# EAGLE board apple_all_pt1 (EAGLE 9.6.1)
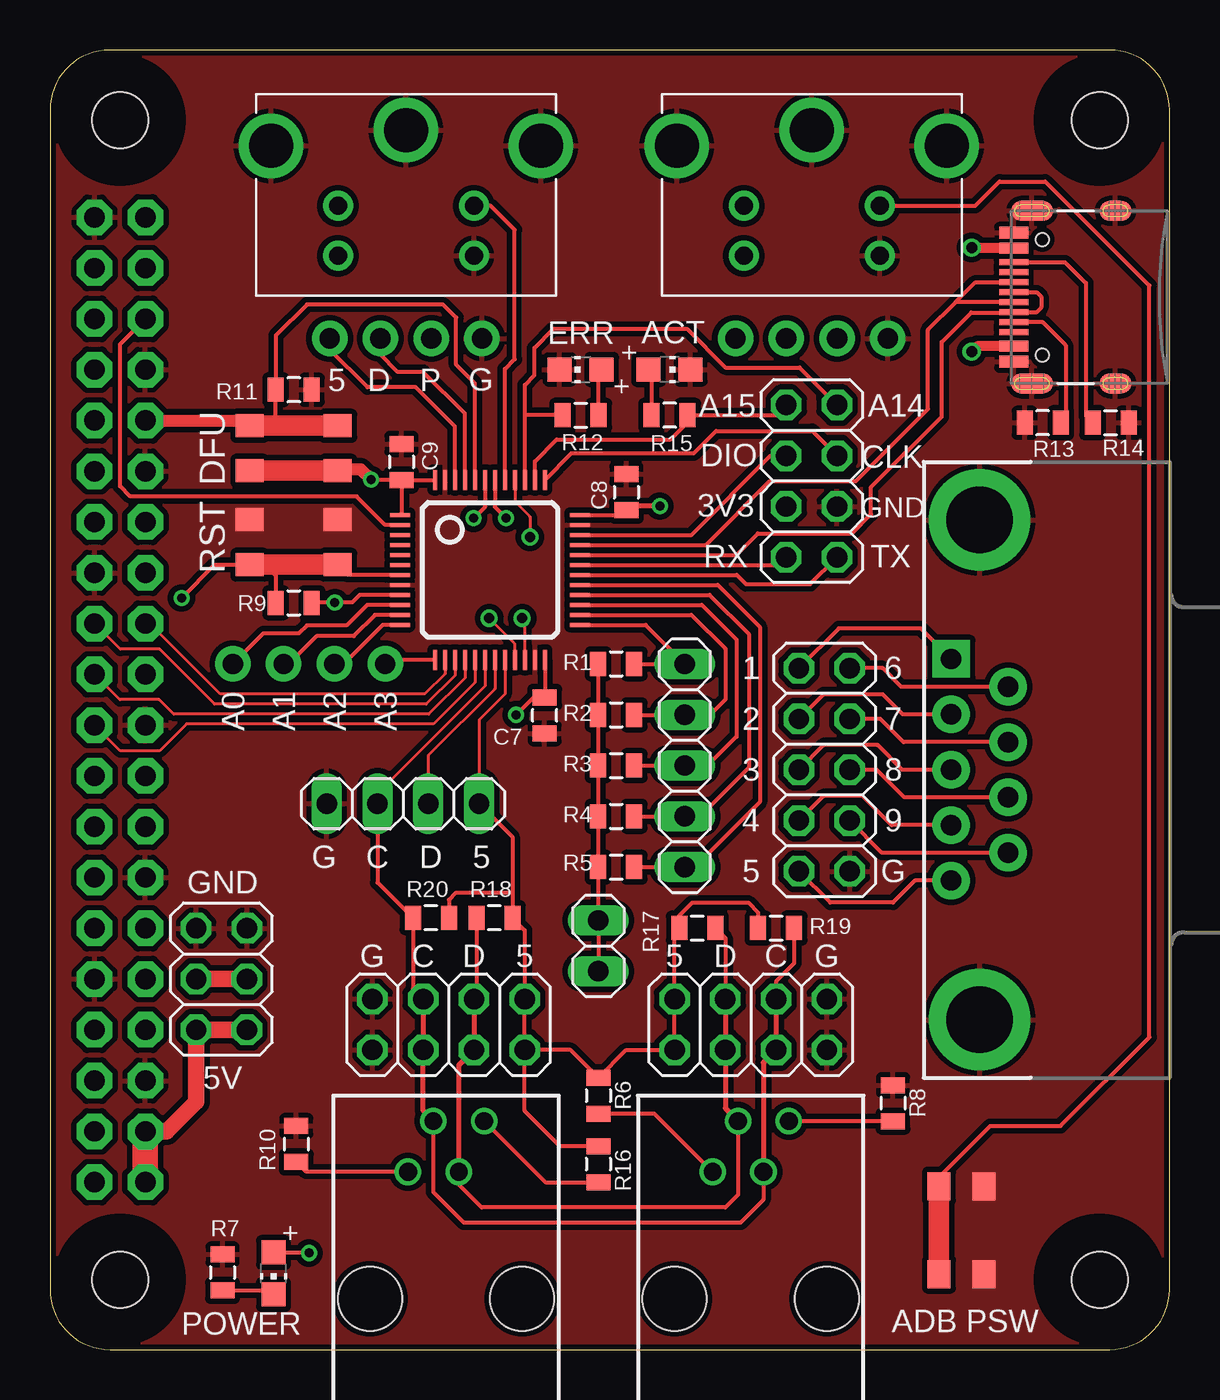
[diagram p0: board, top side]
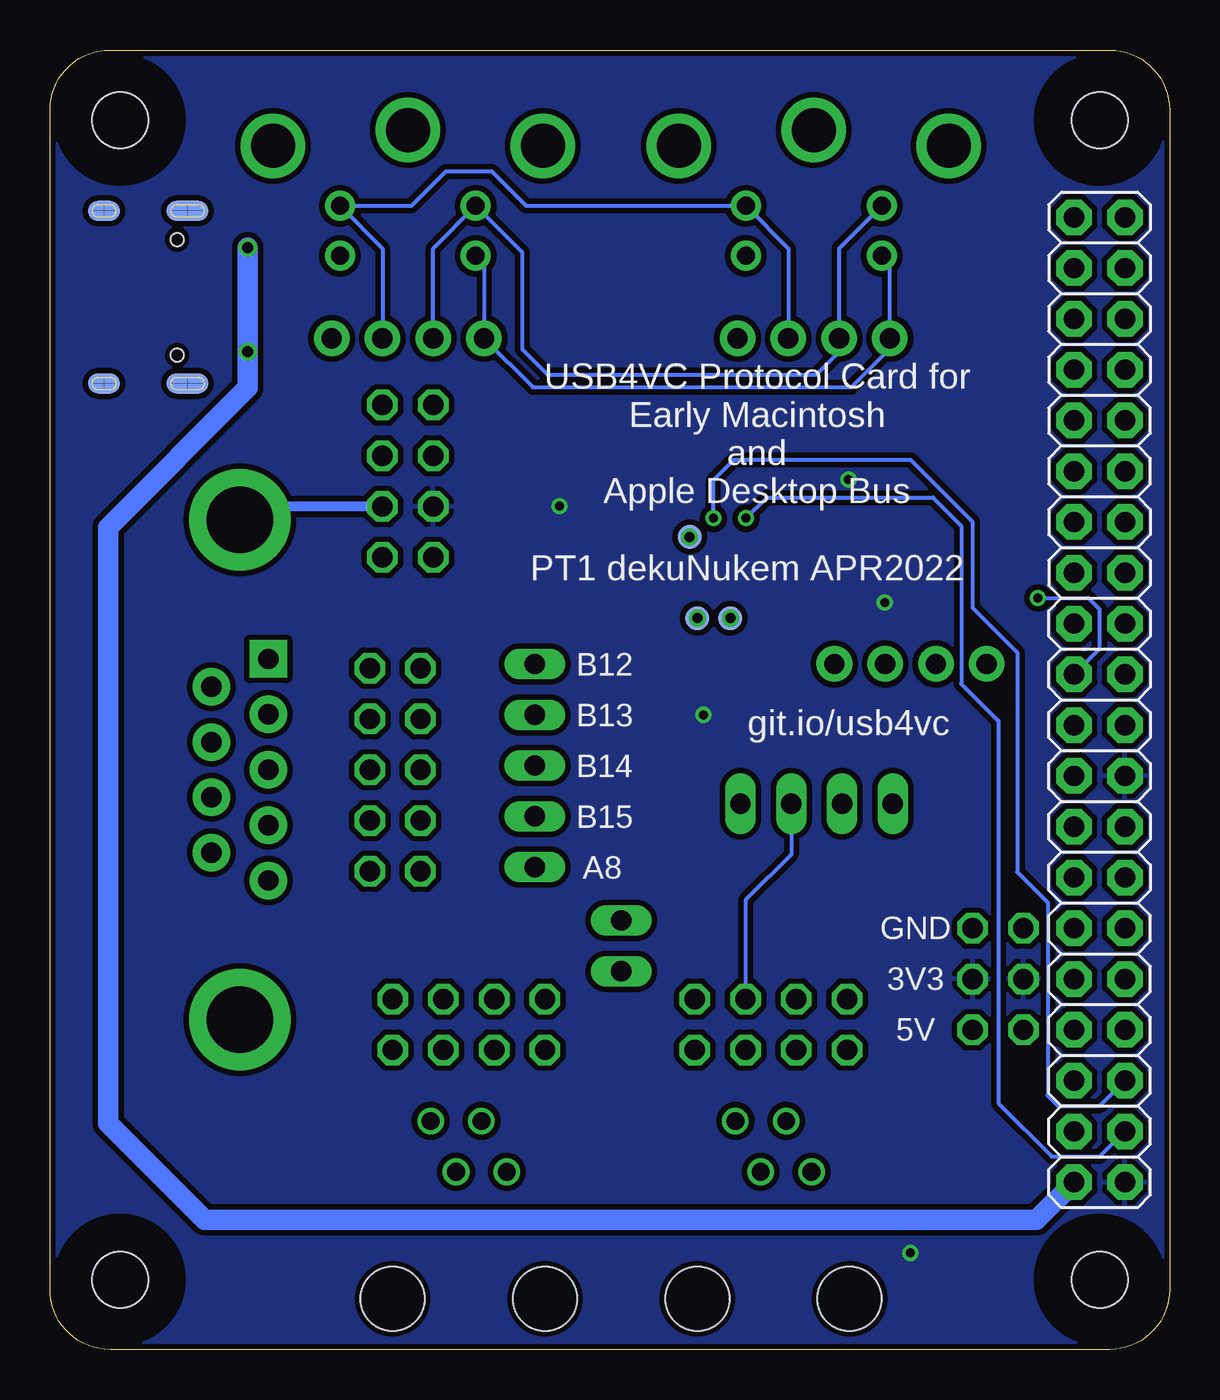
[diagram p1: board, bottom side, seen from below]

Size 56 x 65 mm. Coordinates in mm from the lower left corner, seen from the top.
Outline: 3,0 53,0 arc90 56,3 56,62 arc90 53,65 3,65 arc90 0,62 0,3 arc90 3,0
Copper layers (1*16): Top 0.035mm / dielectric 1.5mm / Bottom 0.035mm
Design rules "deku_2layer_6mil": minimum track width 6mil, minimum drill 15mil, track to track 6mil, track to pad 6mil, pad to pad 6mil, via to via 6mil, smd to smd 6mil, copper to edge 10mil, drill to drill 6mil, minimum pad ring 7mil, minimum via ring 7mil, stop-mask expansion 4mil, vias tented up to drill 25mil, thermal gap 10mil
Net classes: 1 power: width 0.178 mm

## Footprints (pad centres in the part's own frame; a part is rotated, then mirrored left to right if it is on the bottom)
0805@1 = smd 0.8 x 1.2: 1 -0.9,0; 2 0.9,0
TQFP48 = smd 0.2 x 1: 1 -2.75,-4.5; 2 -2.25,-4.5; 3 -1.75,-4.5; 4 -1.25,-4.5; 5 -0.75,-4.5; 6 -0.25,-4.5; 7 0.25,-4.5; 8 0.75,-4.5; 9 1.25,-4.5; 10 1.75,-4.5; 11 2.25,-4.5; 12 2.75,-4.5; 25 2.75,4.5; 26 2.25,4.5; 27 1.75,4.5; 28 1.25,4.5; 29 0.75,4.5; 30 0.25,4.5; 31 -0.25,4.5; 32 -0.75,4.5; 33 -1.25,4.5; 34 -1.75,4.5; 35 -2.25,4.5; 36 -2.75,4.5 | smd 1 x 0.2: 13 4.5,-2.75; 14 4.5,-2.25; 15 4.5,-1.75; 16 4.5,-1.25; 17 4.5,-0.75; 18 4.5,-0.25; 19 4.5,0.25; 20 4.5,0.75; 21 4.5,1.25; 22 4.5,1.75; 23 4.5,2.25; 24 4.5,2.75; 37 -4.5,2.75; 38 -4.5,2.25; 39 -4.5,1.75; 40 -4.5,1.25; 41 -4.5,0.75; 42 -4.5,0.25; 43 -4.5,-0.25; 44 -4.5,-0.75; 45 -4.5,-1.25; 46 -4.5,-1.75; 47 -4.5,-2.25; 48 -4.5,-2.75
DB9 = drill 1.016 pad 1.88 square: 1 -5.54,-1.42 | drill 1.016 pad 1.88: 2 -2.77,-1.42; 3 0,-1.42; 4 2.77,-1.42; 5 5.54,-1.42; 6 -4.15,1.42; 7 -1.38,1.42; 8 1.38,1.42; 9 4.15,1.42 | drill 3.302 pad 5.08: G1 -12.5,0; G2 12.5,0
USB-C-16P = smd 0.3 x 1.45: A5 -1.25,0; A6 -0.25,0; A7 0.25,0; A8 1.25,0; B5 1.75,0; B6 0.75,0; B7 -0.75,0; B8 -1.75,0 | smd 0.6 x 1.45: GND -3.225,0; GND2 3.225,0 | smd 1 x 2.1: SHLD1 -4.32,-0.915; SHLD2 4.32,-0.915 | smd 1 x 2.1 bottom: SHLD3 -4.32,-0.915; SHLD4 4.32,-0.915 | smd 1 x 1.6: SHLD5 -4.32,-5.095; SHLD8 4.32,-5.095 | smd 1 x 1.6 bottom: SHLD6 -4.32,-5.095; SHLD7 4.32,-5.095 | smd 0.55 x 1.45: VBUS1 -2.45,0; VBUS2 2.45,0 | hole 0.65: -2.89,-1.445; 2.89,-1.445
2X20-BIG = drill 1.016 pad 1.778 octagon: 1 -24.13,-1.27; 2 -24.13,1.27; 3 -21.59,-1.27; 4 -21.59,1.27; 5 -19.05,-1.27; 6 -19.05,1.27; 7 -16.51,-1.27; 8 -16.51,1.27; 9 -13.97,-1.27; 10 -13.97,1.27; 11 -11.43,-1.27; 12 -11.43,1.27; 13 -8.89,-1.27; 14 -8.89,1.27; 15 -6.35,-1.27; 16 -6.35,1.27; 17 -3.81,-1.27; 18 -3.81,1.27; 19 -1.27,-1.27; 20 -1.27,1.27; 21 1.27,-1.27; 22 1.27,1.27; 23 3.81,-1.27; 24 3.81,1.27; 25 6.35,-1.27; 26 6.35,1.27; 27 8.89,-1.27; 28 8.89,1.27; 29 11.43,-1.27; 30 11.43,1.27; 31 13.97,-1.27; 32 13.97,1.27; 33 16.51,-1.27; 34 16.51,1.27; 35 19.05,-1.27; 36 19.05,1.27; 37 21.59,-1.27; 38 21.59,1.27; 39 24.13,-1.27; 40 24.13,1.27
2X03 = drill 1.016 octagon: 1 -2.54,-1.27; 2 -2.54,1.27; 3 0,-1.27; 4 0,1.27; 5 2.54,-1.27; 6 2.54,1.27
2X04 = drill 1.016 octagon: 1 -3.81,-1.27; 2 -3.81,1.27; 3 -1.27,-1.27; 4 -1.27,1.27; 5 1.27,-1.27; 6 1.27,1.27; 7 3.81,-1.27; 8 3.81,1.27
2X05 = drill 1.016 octagon: 1 -5.08,-1.27; 2 -5.08,1.27; 3 -2.54,-1.27; 4 -2.54,1.27; 5 0,-1.27; 6 0,1.27; 7 2.54,-1.27; 8 2.54,1.27; 9 5.08,-1.27; 10 5.08,1.27
1X05 = drill 1.016 long: 1 -5.08,0; 2 -2.54,0; 3 0,0; 4 2.54,0; 5 5.08,0
1X02 = drill 1.016 long: 1 -1.27,0; 2 1.27,0
1X04 = drill 1.016 long: 1 -3.81,0; 2 -1.27,0; 3 1.27,0; 4 3.81,0
CHIP-LED0805 = smd 1.2 x 1.2: A 0,-1.05; C 0,1.05
0805 = smd 0.8 x 1.2: 1 -0.9,0; 2 0.9,0
342_SWICH_FOOT = smd 1.4 x 1.15: P$1 -2.2,-1.125; P$2 -2.2,1.125; P$3 2.2,1.125; P$4 2.2,-1.125
TP12R = smd 1.2 x 1.2: TP 0,0
1X04-CLEANBIG = drill 1.016 pad 1.778: 1 -3.81,0; 2 -1.27,0; 3 1.27,0; 4 3.81,0
M2.5HOLE = hole 2.8: 0,0
DIN4 = drill 0.9 pad 1.5: 5V -3.4,-6.3; ADB -3.4,-3.8; GND 3.4,-6.3; PSW 3.4,-3.8 | drill 2.2: SHIELD1 -6.75,-0.8; SHIELD2 0,0; SHIELD3 6.75,-0.8
RJ9 = drill 0.889: 1 -1.905,6.35; 2 -0.635,8.89; 3 0.635,6.35; 4 1.905,8.89 | hole 3.2: -3.81,0; 3.81,0

## Placement (x,y rotation side)
C7  100nF  [0805@1]  24.74,31.72 90 top
C8  100nF  [0805@1]  28.83,42.88 270 top
C9  100nF  [0805@1]  17.58,44.4 270 top
IC1  STM32F072C8T6  [TQFP48]  22,39 270 top
J2  [DB9]  46.5,29 270 top
J4  [USB-C-16P]  48.2,52.63 90 top
JP1  [2X20-BIG]  3.5,32.5 90 bottom
JP2  [2X03]  8.58,18.53 90 top
JP3  [2X04]  38.1,43.43 270 top
JP4  [2X04]  19.94,16.26 0 top
JP5  [2X04]  35.05,16.26 0 top
JP6  [2X05]  38.73,29 270 top
JP7  [1X05]  31.75,29.21 90 top
JP8  [1X02]  27.43,20.19 90 top
JP9  [1X04]  17.65,27.3 0 top
LED1  [CHIP-LED0805]  11.18,3.81 180 top
LED2  [CHIP-LED0805]  26.54,49.02 90 top
LED3  [CHIP-LED0805]  30.99,49.02 270 top
R1  5.1K  [0805]  28.32,34.29 0 top
R2  5.1K  [0805]  28.32,31.75 0 top
R3  5.1K  [0805]  28.32,29.21 0 top
R4  5.1K  [0805]  28.32,26.67 0 top
R5  5.1K  [0805]  28.32,24.13 0 top
R6  5.1K  [0805]  27.43,12.7 270 top
R7  2K  [0805]  8.64,3.86 270 top
R8  5.1K  [0805]  42.16,12.32 270 top
R9  5.1K  [0805]  12.19,37.34 0 top
R10  5.1K  [0805]  12.32,10.29 270 top
R11  5.1K  [0805]  12.19,48.01 180 top
R12  2K  [0805]  26.54,46.74 0 top
R13  5.1K  [0805]  49.66,46.35 180 top
R14  5.1K  [0805]  53.06,46.35 0 top
R15  2K  [0805]  30.99,46.74 180 top
R16  5.1K  [0805]  27.43,9.27 270 top
R17  5.1K  [0805]  32.38,21.08 0 top
R18  5.1K  [0805]  22.23,21.59 180 top
R19  5.1K  [0805]  36.32,21.08 0 top
R20  5.1K  [0805]  19.05,21.59 180 top
SW1  324_SW  [342_SWICH_FOOT]  12.19,40.39 180 top
SW2  324_SW  [342_SWICH_FOOT]  12.19,45.09 180 top
SW3  324_SW  [342_SWICH_FOOT]  45.59,5.97 90 top
TP1  TPTP12R  [TP12R]  21.97,36.58 0 bottom
TP2  TPTP12R  [TP12R]  23.62,36.58 0 bottom
TP3  TPTP12R  [TP12R]  24,40.64 0 bottom
U$1  PINHD1X4  [1X04-CLEANBIG]  17.8,50.57 180 top
U$2  M2.5HOLE  [M2.5HOLE]  3.5,3.5 0 top
U$3  M2.5HOLE  [M2.5HOLE]  52.5,3.5 0 top
U$4  ADB  [DIN4]  17.8,61 0 top
U$5  ADB  [DIN4]  38.1,61 0 top
U$6  M2.5HOLE  [M2.5HOLE]  3.5,61.5 0 top
U$7  M2.5HOLE  [M2.5HOLE]  52.5,61.5 0 top
U$8  PINHD1X4  [1X04-CLEANBIG]  38.1,50.57 180 top
U$9  RJ9PTH  [RJ9]  19.81,2.54 0 top
U$10  PINHD1X4  [1X04-CLEANBIG]  12.95,34.29 0 top
U$11  RJ9PTH  [RJ9]  35.05,2.54 0 top

## Library data of the parts
C7-C9 IC1 = clock
J2 = SparkFun-Connectors; PROD_ID: CONN-08194
J4 = SparkFun-Connectors; PROD_ID: CONN-14122
JP1 U$1 U$8 U$10 = adafruit_changed
JP2-JP9 = pinhead
LED1-LED3 = adafruit
R1-R20 = SparkFun-Passives
SW1-SW3 = 3pos_slide_switch_centered
TP1-TP3 = testpad
U$2 U$3 U$6 U$7 = f1c100s
U$4 U$5 = adb
U$9 U$11 = SparkFun-Retired

## Nets
+3V3: C7.2 C8.2 C9.2 IC1.1 IC1.9 IC1.24 IC1.36 IC1.48 JP1.1 JP1.17 JP2.3 JP2.4 JP3.5 LED1.A R9.2 SW2.P$2 SW2.P$3
+5V: J4.VBUS1 J4.VBUS2 JP1.2 JP1.4 JP2.1 JP2.2
GND: C7.1 C8.1 C9.1 IC1.8 IC1.23 IC1.35 IC1.47 J2.G1 J2.G2 J4.GND J4.GND2 J4.SHLD1 J4.SHLD2 J4.SHLD3 J4.SHLD4 J4.SHLD5 J4.SHLD6 J4.SHLD7 J4.SHLD8 JP1.6 JP1.9 JP1.14 JP1.20 JP1.25 JP1.30 JP1.34 JP1.39 JP2.5 JP2.6 JP3.6 JP4.1 JP4.2 JP5.7 JP5.8 JP6.10 JP9.1 LED2.C LED3.C R7.1 R8.1 R10.1 R11.1 R13.2 R14.2 SW1.P$1 SW1.P$4 SW3.P$1 SW3.P$4 U$1.1 U$4.GND U$4.SHIELD1 U$4.SHIELD2 U$4.SHIELD3 U$5.GND U$5.SHIELD1 U$5.SHIELD2 U$5.SHIELD3 U$8.1
KB_5V: IC1.20 JP4.7 JP4.8 JP5.1 JP5.2 JP9.4 R6.1 R16.1 R17.1 R18.1 R19.1 R20.1
KB_CLK: IC1.18 JP4.3 JP4.4 JP5.5 JP5.6 JP9.2 R19.2 R20.2 U$9.2 U$11.3
KB_DATA: IC1.19 JP4.5 JP4.6 JP5.3 JP5.4 JP9.3 R17.2 R18.2 U$9.3 U$11.2
N$1: J4.A5 R13.1
N$2: LED2.A R12.2
N$3: IC1.46 U$1.4 U$4.5V U$5.5V U$8.4
N$4: IC1.28 JP7.2 R4.2
N$5: R8.2 U$11.4
N$6: IC1.39 JP3.2 R12.1
N$7: J4.B5 R14.1
N$8: IC1.33 J4.A6 J4.B6
N$9: IC1.32 J4.A7 J4.B7
N$10: IC1.27 JP7.3 R3.2
N$11: IC1.40 TP3.TP
N$12: IC1.31 JP3.7
N$13: IC1.7 JP1.22 R9.1 SW1.P$2 SW1.P$3
N$14: IC1.30 JP3.8
N$15: IC1.34 JP3.3
N$16: IC1.37 JP3.4
N$17: IC1.21 TP1.TP
N$18: IC1.44 JP1.32 R11.2 SW2.P$1 SW2.P$4
N$19: IC1.22 TP2.TP
N$22: IC1.42 JP1.5
N$23: IC1.43 JP1.3
N$26: J2.1 JP6.1
N$27: IC1.38 JP3.1 R15.1
N$28: LED3.A R15.2
N$29: LED1.C R7.2
N$30: J2.2 JP6.3
N$31: J2.3 JP6.5
N$32: J2.4 JP6.7
N$33: J2.5 JP6.9
N$34: J2.6 JP6.2
N$35: J2.7 JP6.4
N$36: J2.8 JP6.6
N$37: IC1.2 JP1.36
N$38: IC1.10 U$10.1
N$39: IC1.11 U$10.2
N$40: IC1.12 U$10.3
N$41: IC1.13 U$10.4
N$42: J2.9 JP6.8
N$43: IC1.45 U$1.3 U$4.ADB U$5.ADB U$8.3
N$45: IC1.26 JP7.4 R2.2
N$46: IC1.41 SW3.P$2 SW3.P$3 U$1.2 U$4.PSW U$5.PSW U$8.2
N$47: IC1.25 JP7.5 R1.2
N$48: IC1.29 JP7.1 R5.2
N$49: JP8.1 JP8.2 R1.1 R2.1 R3.1 R4.1 R5.1
N$50: R6.2 U$11.1
N$51: R16.2 U$9.4
N$52: R10.2 U$9.1
SPI_CS: IC1.14 JP1.24
SPI_MISO: IC1.16 JP1.21
SPI_MOSI: IC1.17 JP1.19
SPI_SCK: IC1.15 JP1.23

## Tracks (layer width: path | path; a pad name or v marks a point on that pad's centre or on a via)
+3V3  (via drill 0.45)
  Top 0.203: v16.05,43.51 17.57,43.51 C9.2 | C9.2 IC1.48 | C9.2 17.58,41.83 IC1.1 | R9.2 13.12,37.36 v14.25,37.36 15.11,37.36 15.5,37.75 IC1.9 | IC1.36 28.63,41.75 28.84,41.96 29.07,42.19 | v23.32,31.75 24.19,32.62 C7.2 24.75,32.63 IC1.24 | LED1.A 12.92,4.86 v12.95,4.83
  Top 0.254: v30.5,42.19 29.07,42.19 | 28.84,41.96 C8.2
  Top 0.61: v16.05,43.51 15.54,44.02 14.45,44.02 SW2.P$2
  Top 0.813: JP2.3 JP2.4
  Top 1.016: SW2.P$3 SW2.P$2
  pour Bottom (isolate 0.279, rank 2): 0,3 0,62 arc-90 3,65 53,65 arc-90 56,62 56,3 arc-90 53,0 3,0 arc-90
+5V  (via drill 0.55)
  Top 0.508: J4.VBUS2 46.13,55.09 v46.1,55.12 | J4.VBUS1 46.38,50.19 v46.1,49.91
  Top 0.813: JP1.4 5.83,10.91 7.31,12.39 JP2.2 JP2.1
  Top 1.27: JP1.4 JP1.2
  Bottom 1.016: JP1.2 6.66,6.48 48.26,6.48 53.09,11.3 53.09,41.12 46.1,48.11 v46.1,49.91 v46.1,55.12
GND
  Bottom 0.508: JP3.6 45.84,42.16 J2.G1
  pour Top (isolate 0.279): 3,0 53,0 arc90 56,3 56,62 arc90 53,65 3,65 arc90 0,62 0,3 arc90
KB_5V
  Top 0.152: IC1.20 22.75,32.78 21.46,31.5 JP9.4
  Top 0.203: R19.1 35.42,21.86 34.92,22.35 32.13,22.35 31.48,21.71 R17.1 31.24,20.84 JP5.2 JP5.1 28.82,14.99 R6.1 26.05,14.99 JP4.7 | R16.1 25.52,10.17 23.75,11.94 JP4.7 | JP4.7 JP4.8 23.75,20.97 R18.1 23.12,22.86 | R20.1 19.95,22.49 20.32,22.86 23.12,22.86 | JP9.4 23.12,25.64 23.12,22.86
KB_CLK
  Top 0.152: IC1.18 21.75,33.18 16.38,27.81 JP9.2
  Top 0.203: R19.2 37.22,19.32 36.32,18.41 JP5.6 | JP4.4 18.15,18.05 R20.2 16.38,23.36 JP9.2 | U$11.3 35.69,7.49 34.54,6.35 20.7,6.35 19.18,7.87 U$9.2
  Top 0.254: U$11.3 35.69,14.35 JP5.5 JP5.6 | U$9.2 18.67,11.94 JP4.3 JP4.4
KB_DATA
  Top 0.152: IC1.19 22.25,33.05 18.92,29.72 JP9.3
  Top 0.203: R17.2 33.78,20.59 JP5.4 | R18.2 21.32,17.64 JP4.6 | U$11.2 34.42,7.75 33.78,7.11 21.59,7.11 20.45,8.26 U$9.3
  Top 0.254: U$11.2 33.78,12.06 JP5.3 JP5.4 | U$9.3 20.45,14.22 JP4.5 JP4.6
  Bottom 0.203: JP9.3 18.92,24.77 21.21,22.48 JP4.6
N$1
  Top 0.203: R13.1 50.81,46.61 50.81,50.23 49.66,51.38 J4.A5
N$2
  Top 0.203: R12.2 27.44,48.87 LED2.A
N$3
  Top 0.203: IC1.46 20.25,46.17 18.29,48.13 15.88,48.13 13.99,50.02 U$1.4
  Bottom 0.203: U$4.5V 14.02,54.32 14.02,50.6 U$1.4 13.99,50.07 15.92,48.13 31.85,48.13 U$8.4 34.29,54.29 U$5.5V
N$4
  Top 0.203: IC1.28 32.99,37.75 34.95,35.79 34.95,29.11 32.51,26.67 JP7.2 R4.2
N$5
  Top 0.203: U$11.4 R8.2
N$6
  Top 0.203: JP3.2 37.49,49.12 33.78,49.12 31.85,51.05 25.2,51.05 24.23,50.09 24.23,48.73 23.75,48.25 23.75,46.74 | IC1.39 23.75,46.74 | R12.1 23.75,46.74
N$7
  Top 0.203: J4.B5 50.77,54.38 51.82,53.34 51.82,46.7 R14.1
N$8
  Top 0.203: IC1.33 32.81,40.25 35.99,43.43 40.31,43.43 43.92,47.04 43.92,51 45.29,52.38 45.3,52.38 | J4.B6 46.3,53.38 45.3,52.38 | J4.A6 45.3,52.38
N$9
  Top 0.152: 48.22,51.87 J4.B7
  Top 0.203: IC1.32 34.34,39.75 35.41,40.82 40.11,40.82 41.07,41.78 41.07,43.13 44.6,46.66 44.6,50.39 46.08,51.87 48.22,51.87 49.33,51.87 49.58,52.12 49.58,52.65 49.35,52.88 J4.A7
N$10
  Top 0.203: IC1.27 32.6,37.25 34.34,35.51 34.34,30.66 32.89,29.21 JP7.3 R3.2
N$11  (via drill 0.5)
  Top 0.152: IC1.40 23.25,42.41 24,41.66 TP3.TP
  other vias: 24,40.64
N$12
  Top 0.203: IC1.31 36.46,39.25 JP3.7
N$13  (via drill 0.45)
  Top 0.203: IC1.7 14.9,38.75 SW1.P$2 | 10.74,39.26 11.29,38.71 R9.1 | v6.58,37.59 8.25,39.26 SW1.P$3
  Top 1.016: SW1.P$3 10.74,39.26 SW1.P$2
  Bottom 0.203: JP1.22 3.5,35.03 3.5,37.03 4.06,37.59 v6.58,37.59
N$14
  Top 0.203: IC1.30 34.35,38.75 34.82,38.28 38.02,38.28 JP3.8
N$15
  Top 0.203: IC1.34 32.09,40.75 36.04,44.7 JP3.3
N$16
  Top 0.203: IC1.37 26.08,44.83 32.21,44.83 33.33,45.95 38.12,45.95 JP3.4
N$17  (via drill 0.5)
  Top 0.152: IC1.21 23.25,35.3 TP1.TP
  other vias: 21.97,36.58
N$18
  Top 0.203: 11.28,46.21 11.28,47.99 R11.2 11.29,50.71 12.85,52.27 19.66,52.27 20.32,51.61 20.32,49.25 21.25,48.32 IC1.44
  Top 0.61: JP1.32 9.73,46.47 SW2.P$4
  Top 1.016: SW2.P$4 11.28,46.21 SW2.P$1
N$19  (via drill 0.5)
  Top 0.152: IC1.22 23.75,36.45 TP2.TP
  other vias: 23.62,36.58
N$22  (via drill 0.45)
  Top 0.203: IC1.42 22.25,42.14 v22.81,41.58
  Bottom 0.203: v22.81,41.58 22.81,43.48 21.79,44.5 12.95,44.5 9.86,41.4 9.86,37.11 7.62,34.87 7.62,23.88 6.1,22.35 6.1,12.7 5.59,12.19 3.49,12.19 JP1.5
N$23  (via drill 0.45)
  Top 0.203: IC1.43 21.75,42.15 v21.18,41.58
  Bottom 0.203: v21.18,41.58 20.14,42.62 11.84,42.62 10.41,41.2 10.41,33.3 8.56,31.45 8.56,12.32 5.89,9.65 3.49,9.65 JP1.3
N$26
  Top 0.203: J2.1 43.55,36.07 39.45,36.07 JP6.1
N$27
  Top 0.203: IC1.38 24.25,44.42 25.35,45.52 31.05,45.52 31.89,46.35 R15.1 36.32,46.74 JP3.1
N$28
  Top 0.203: LED3.A 30.09,48.87 R15.2
N$29
  Top 0.203: R7.2 10.97,2.96 LED1.C
N$30
  Top 0.203: J2.2 42.65,31.77 41.66,32.77 38.69,32.77 JP6.3
N$31
  Top 0.203: J2.3 42.63,29 41.4,30.23 38.69,30.23 JP6.5
N$32
  Top 0.203: J2.4 42.1,26.23 40.64,27.69 38.69,27.69 JP6.7
N$33
  Top 0.203: J2.5 43.27,23.46 42.16,22.35 39.03,22.35 JP6.9
N$34
  Top 0.203: J2.6 42.59,33.15 41.66,34.08 JP6.2
N$35
  Top 0.203: J2.7 42.69,30.38 41.53,31.54 JP6.4
N$36
  Top 0.203: J2.8 42.74,27.62 41.36,29 JP6.6
N$37
  Top 0.203: IC1.2 16.76,41.25 15.34,42.67 4.01,42.67 3.5,43.18 3.5,50.28 JP1.36
N$38
  Top 0.203: IC1.10 15.86,37.25 14.83,36.22 12.85,36.22 12.45,35.81 10.67,35.81 U$10.1
N$39
  Top 0.203: IC1.11 16.25,36.75 15.19,35.69 13.34,35.69 11.94,34.29 U$10.2
N$40
  Top 0.203: IC1.12 16.64,36.25 14.68,34.29 U$10.3
N$41
  Top 0.203: IC1.13 16.97,34.5 U$10.4
N$42
  Top 0.203: J2.9 41.62,24.85 JP6.8
N$43
  Top 0.203: IC1.45 20.75,46.81 18.67,48.9 17.4,48.9 16.53,49.76 U$1.3
  Bottom 0.203: U$4.ADB 16.53,55.07 U$1.3 16.53,49.89 17.65,48.77 31.11,48.77 32.38,50.04 32.38,54.88 U$5.ADB 36.83,55.07 U$8.3
N$45
  Top 0.203: IC1.26 32.08,36.75 33.78,35.05 33.78,32.51 33.02,31.75 JP7.4 R2.2
N$46
  Top 0.203: IC1.41 22.75,49.04 23.24,49.53 23.24,56.01 22.05,57.2 U$4.PSW | U$5.PSW 46.28,57.2 47.5,58.42 49.78,58.42 54.99,53.21 54.99,15.62 50.55,11.18 47.03,11.18 44.47,8.62 SW3.P$3
  Top 1.016: SW3.P$2 SW3.P$3
  Bottom 0.203: U$1.2 19.07,55.07 U$4.PSW 32.18,57.2 33.91,58.93 36.2,58.93 37.92,57.2 U$5.PSW 39.37,55.07 U$8.2
N$47
  Top 0.203: IC1.25 29.79,36.25 JP7.5 R1.2
N$48
  Top 0.203: IC1.29 33.4,38.25 35.51,36.14 35.51,27.38 32.26,24.13 JP7.1 R5.2
N$49
  Top 0.203: R1.1 R2.1 R3.1 R4.1 R5.1 27.42,21.47 JP8.2 JP8.1
N$50
  Top 0.203: U$11.1 30.24,11.8 R6.2
N$51
  Top 0.203: U$9.4 24.78,8.37 R16.2
N$52
  Top 0.203: U$9.1 12.82,8.89 R10.2
SPI_CS
  Top 0.152: IC1.14 19.75,33.8 18.75,32.79 8.52,32.79 5,36.31 JP1.24
SPI_MISO
  Top 0.152: IC1.16 20.75,33.58 18.95,31.77 6.2,31.77 5.46,32.51 3.49,32.51 JP1.21
SPI_MOSI
  Top 0.152: JP1.19 3.51,29.95 5.49,29.95 6.83,31.29 19.18,31.29 21.25,33.37 IC1.17
SPI_SCK
  Top 0.152: IC1.15 20.25,33.71 18.82,32.28 8.23,32.28 5.49,35.03 3.51,35.03 JP1.23

## Text on the board
tNames: ERR | ACT | G | 5 | D | P | A15 | A14 | DFU | DIO | CLK | 3V3 | GND | RST | RX | TX | 1 | 6 | A0 | A1 | A2 | A3 | 2 | 7 | 3 | 8 | 4 | 9 | G | C | D | 5 | 5 | G | GND | G | C | D | 5 | 5 | D | C | G | 5V | POWER | ADB PSW
bNames: USB4VC Protocol Card for / Early Macintosh / and / Apple Desktop Bus | PT1 dekuNukem APR2022 | B12 | B13 | git.io/usb4vc | B14 | B15 | A8 | GND | 3V3 | 5V